# Altium PCB PCB1.PcbDoc
Units mm, origin at the board's own origin, x right, y up, seen from the top; angles counter-clockwise.
Board outline 47.5 x 49.25 mm, 2 copper layers (Top Layer, Bottom Layer); 19 components, 15 nets, 95 pads, 6 vias.
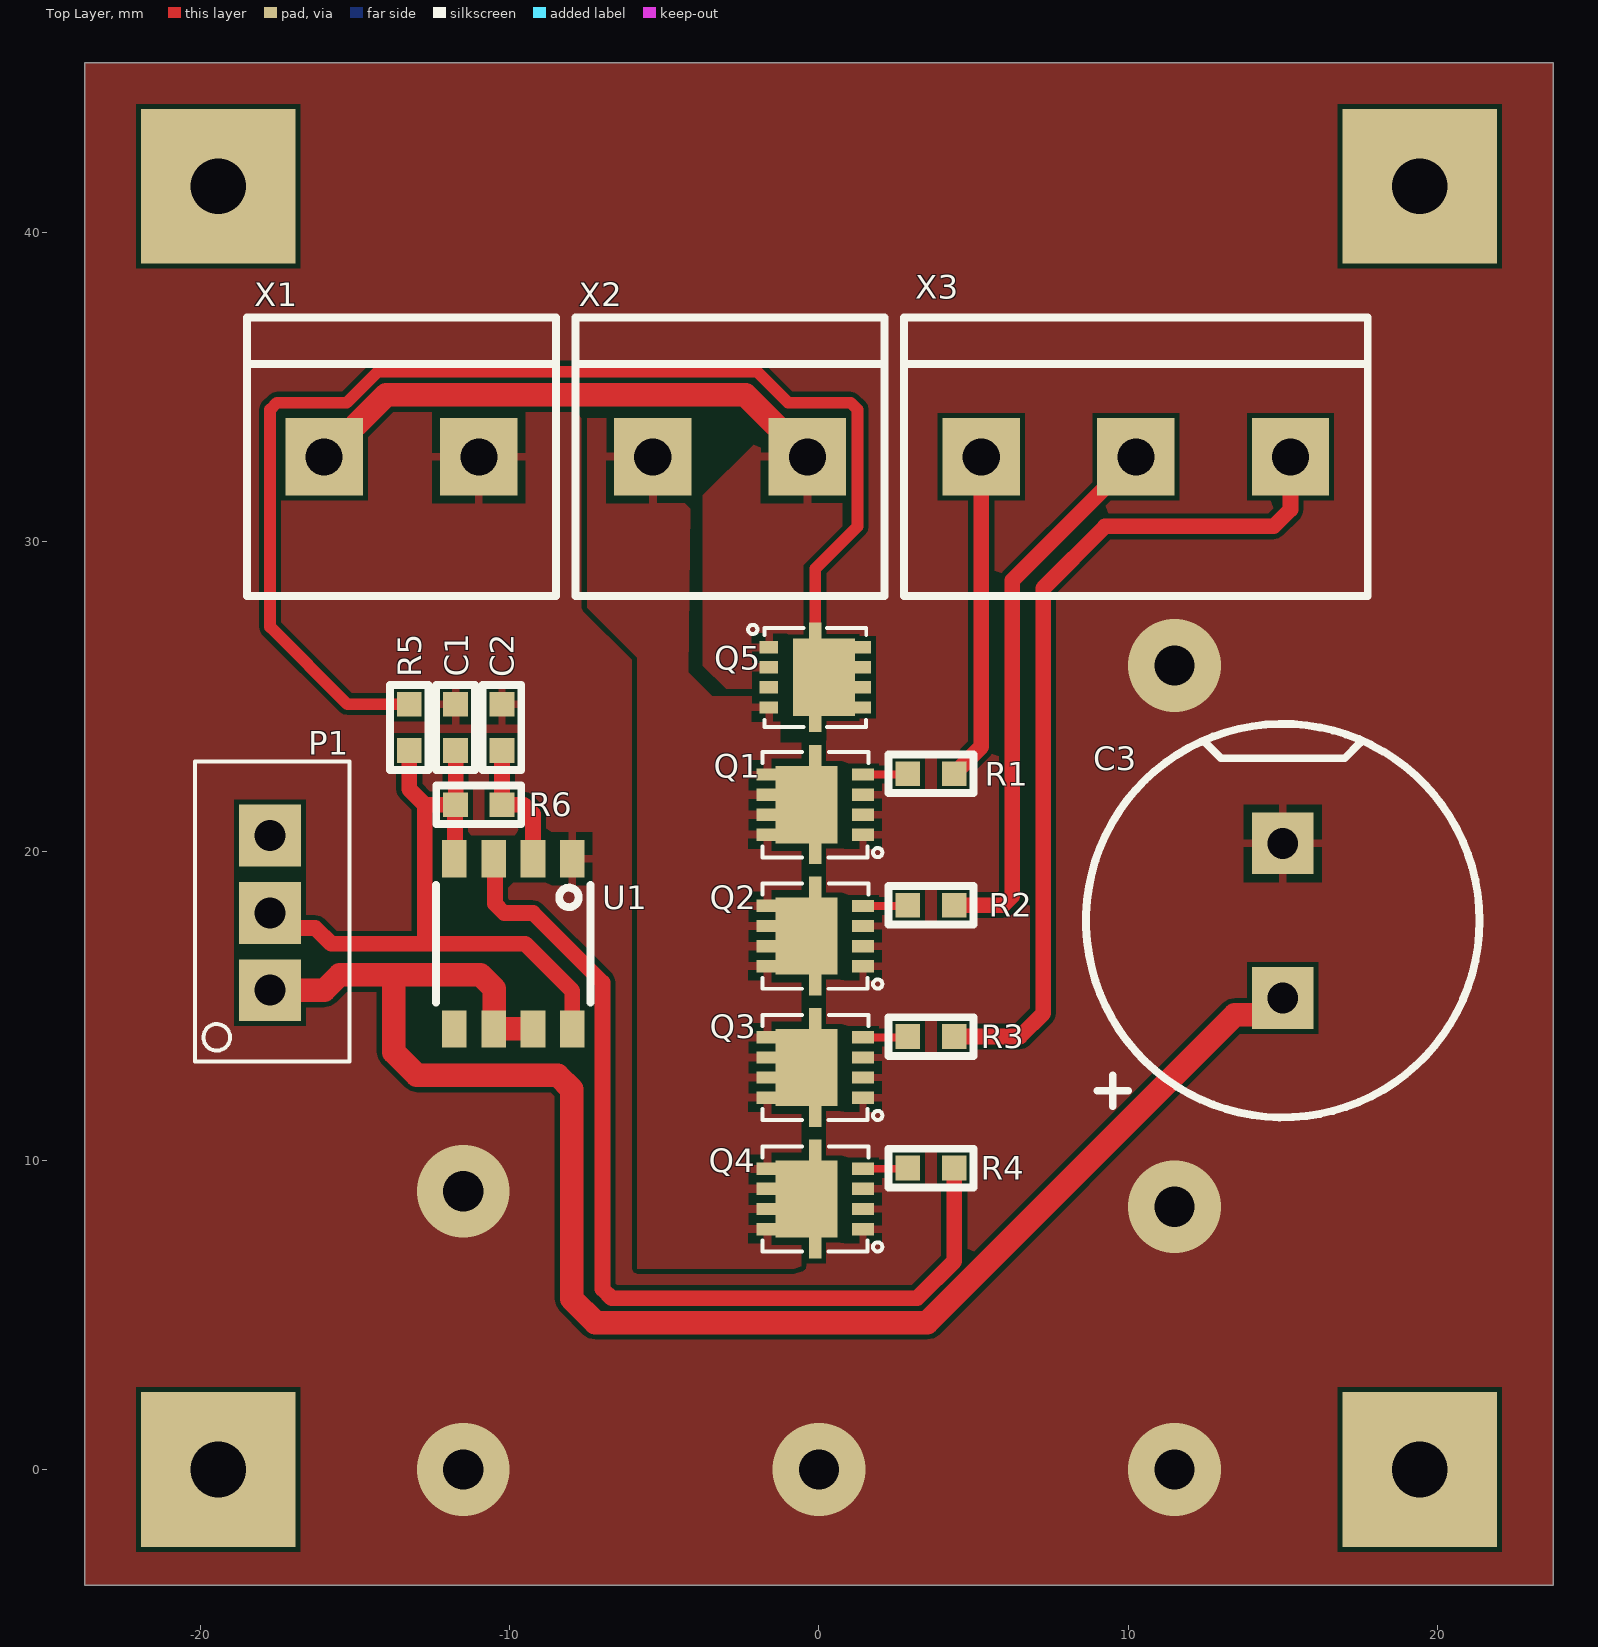
[diagram p0: Top Layer view]
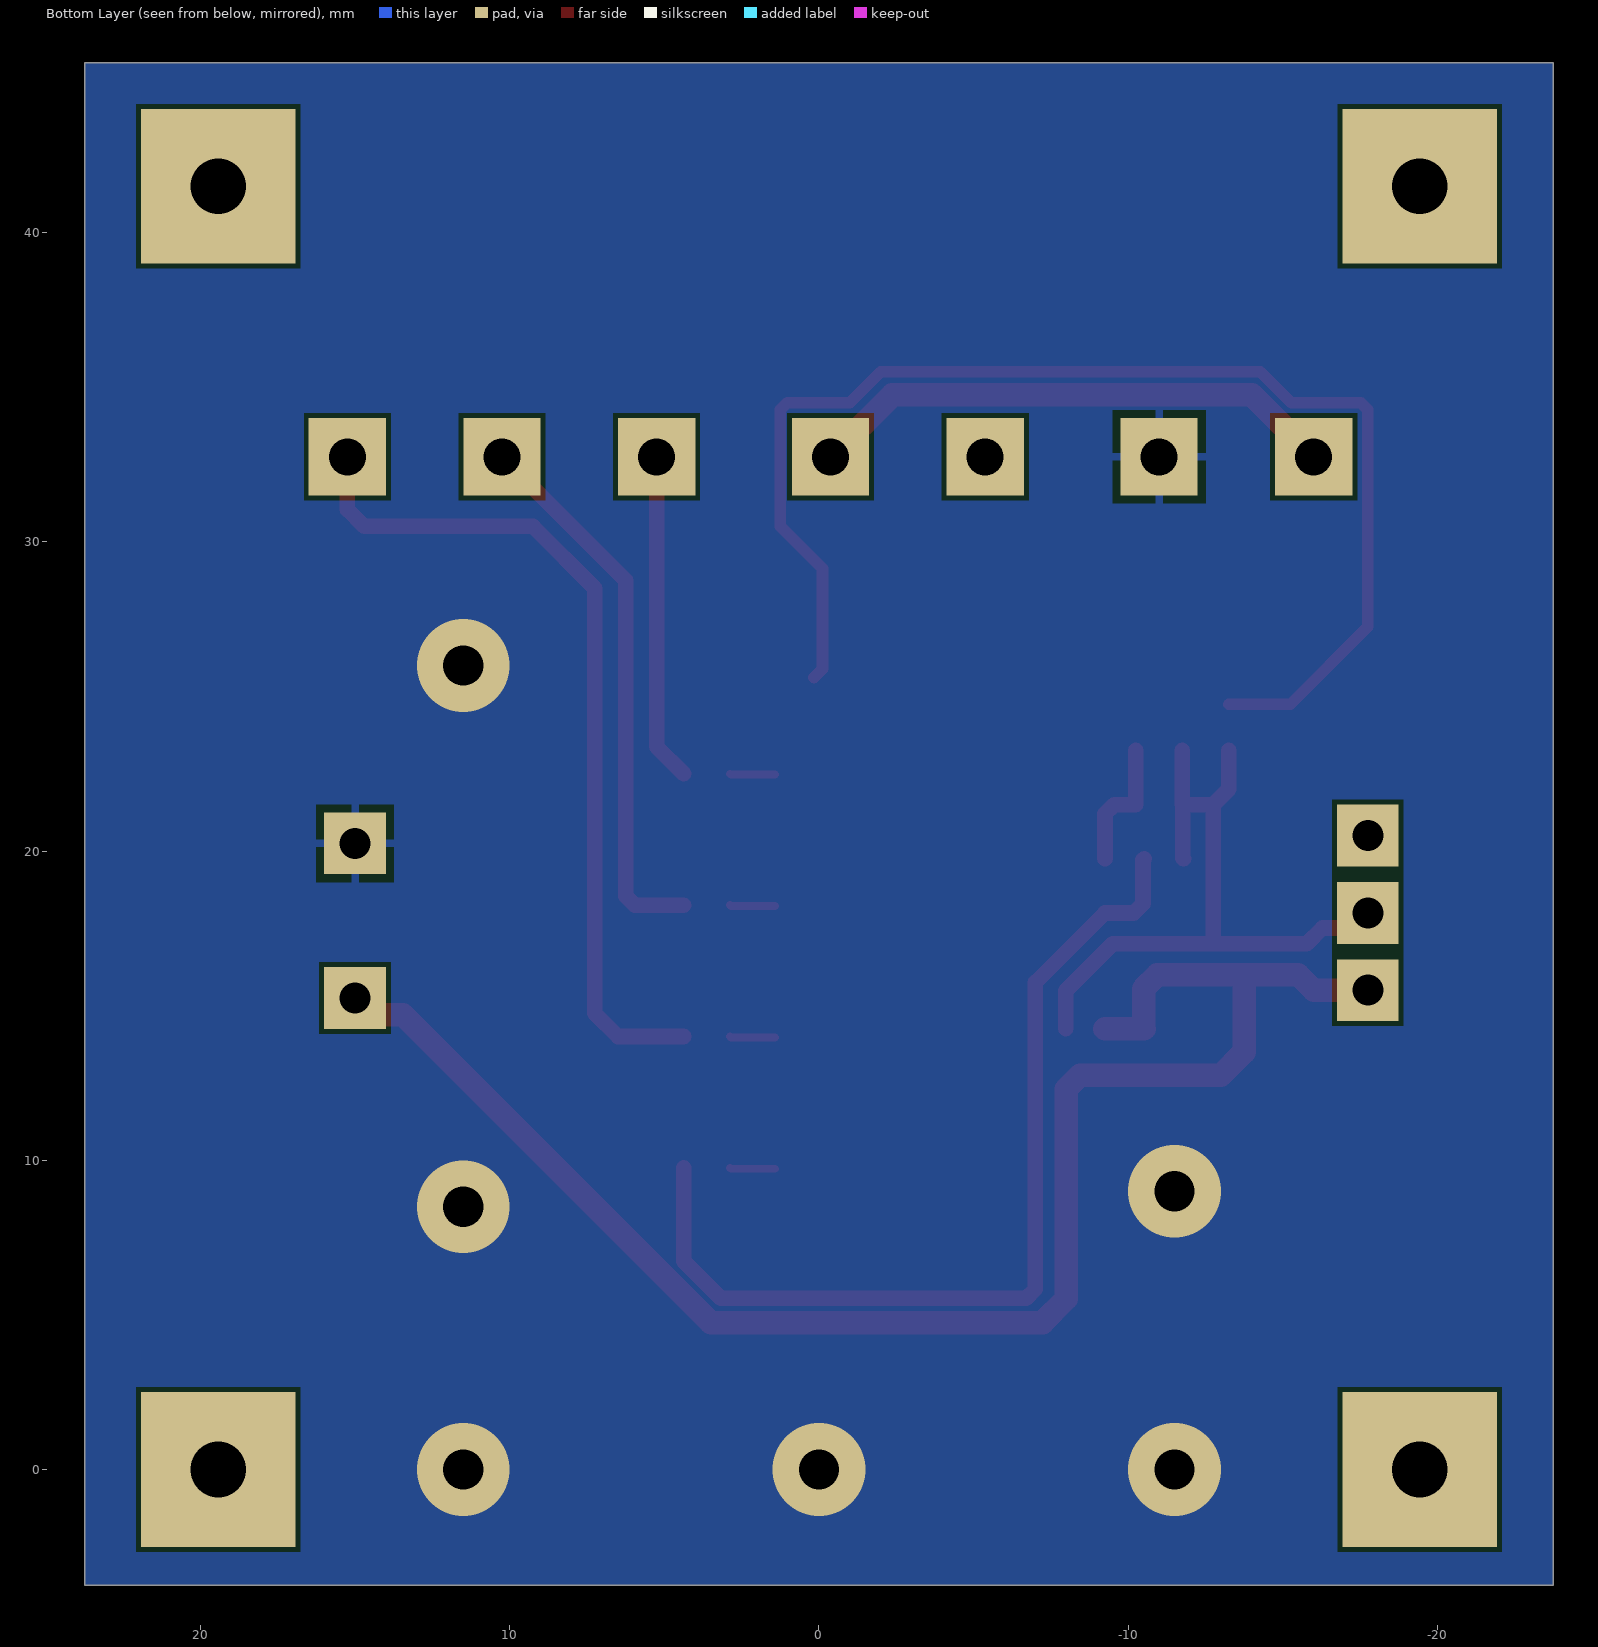
[diagram p1: Bottom Layer view, seen from below]
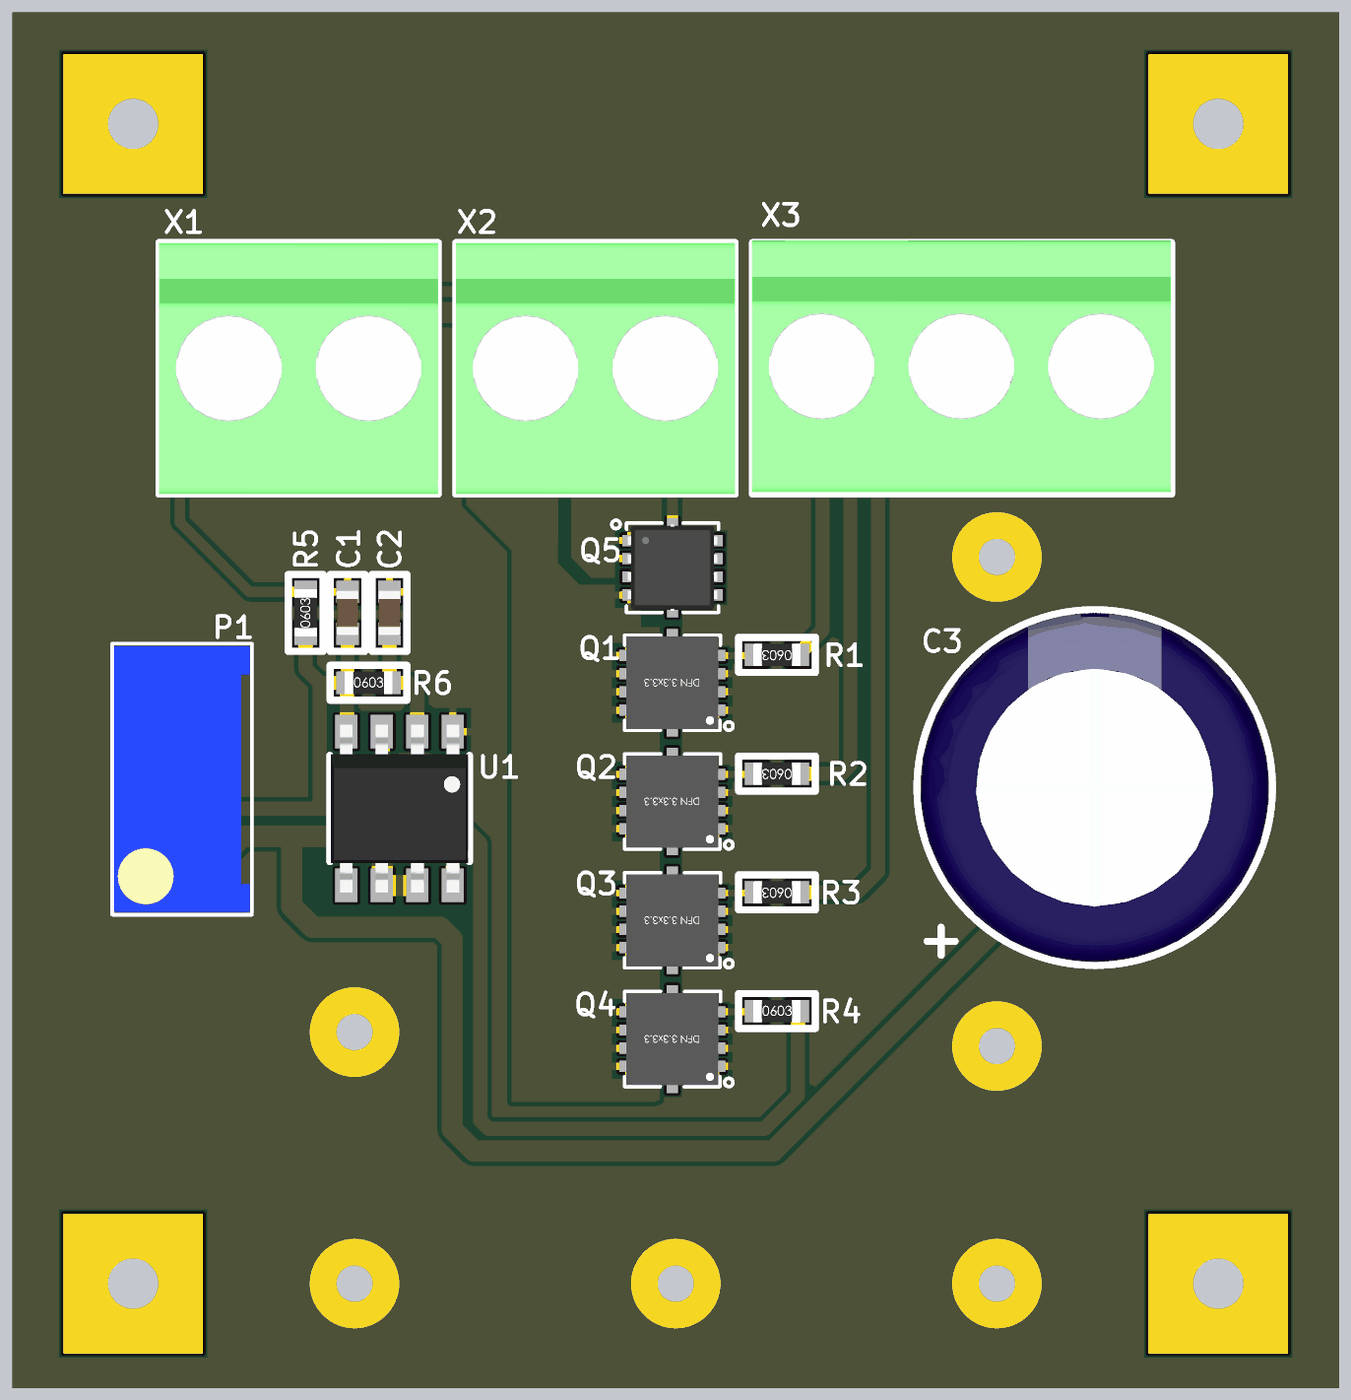
[diagram p2: 3D render of the assembled board from above, using the file's embedded part models]

## Layer stack, top to bottom
Top Solder: solder mask 0.0102, Solder Resist, Dk 3.5
Top Layer: signal copper 0.0356
Dielectric 1: dielectric 0.32, FR-4, Dk 4.8
Bottom Layer: signal copper 0.0356
Bottom Solder: solder mask 0.0102, Solder Resist, Dk 3.5

## Board outline
-23.75,-3.75 23.75,-3.75 23.75,45.5 -23.75,45.5

## Design rules (kind name [scope] priority, off if disabled: settings)
Clearance [All] p1: gap=0.152 ignorepadtopadclearanceinfootprint=FALSE except(0: Arc-Hole Track-Hole SMDPad-Hole THPad-Hole Via-Hole Fill-Hole Poly-Hole Region-Hole Text-Hole)
PolygonConnect [All] p1: connectstyle=Relief reliefconductorwidth=0.254 reliefentries=4 polygonreliefangle="90 Angle" airgapwidth=0.254
RoutingVias [All] p1: holewidth=0.711 width=1.27 viastyle="Through Hole" minholewidth=0.711 minwidth=1.27 maxholewidth=0.711 maxwidth=1.27
SolderMaskExpansion [All] p1: expansion=0.102 istentingtop=FALSE
Width [All] p1: maxlimit=0.762 minlimit=0.254 preferedwidth=0.508 minimp=50.000000 maximp=50.000000 favimp=50.000000
30 further rules are at their usual default settings.

## Components (designator, comment, footprint, x,y, rotation, side; value= is the part's Value field where it differs from the comment)
C1 "Capacitor" CAP_0603 -11.75,24 r270 top
C2 "Capacitor" CAP_0603 -10.25,24 r90 top
C3 "Capacitor_Pol" CAP_POL_12.5x20 15,17.75 r180 top value=1000uF
P1 "Potentiometer" 3296w -17.75,15.5 r90 top
Q1 "YJQ35N04A" DFN3.3x3.3 -0.125,21.5 r180 top
Q2 "YJQ35N04A" DFN3.3x3.3 -0.125,17.25 r180 top
Q3 "YJQ35N04A" DFN3.3x3.3 -0.125,13 r180 top
Q4 "YJQ35N04A" DFN3.3x3.3 -0.125,8.75 r180 top
Q5 "AON7407" DFN3x3 -0.116,25.617 r0 top
R1 "Resistor" RES_0603 3.625,22.5 r180 top
R2 "Resistor" RES_0603 3.625,18.25 r180 top
R3 "Resistor" RES_0603 3.625,14 r180 top
R4 "Resistor" RES_0603 3.625,9.75 r0 top
R5 "Resistor" RES_0603 -13.25,24 r90 top
R6 "Resistor" RES_0603 -11,21.5 r0 top
U1 "NE555" SO8 -9.885,17 r180 top
X1 "SUPLY" "SCREW_TERMINAL_X2 5mm" -16,32.75 r0 top
X2 "SUPLY" "SCREW_TERMINAL_X2 5mm" -5.375,32.75 r0 top
X3 "?" "SCREW_TERMINAL_X3 5mm" 5.25,32.75 r0 top

## Footprints (in the part's own frame and the unit in brackets; to place one, negate y for a bottom-side part, rotate by r counter-clockwise, add the part's x,y. Pads: shape width x height; smd on the part's side, far side on the other; paste and mask are expansions set on the pad)
3296w [mm]
  rect 2x2 hole 1: 1(0,0) 2(2.5,0) 3(5,0)
  silkscreen extent -2.3,-2.58 7.4,2.42, body extent -2.2,-2.5 7.3,2.35, height 11.55
CAP_0603 [mm]
  rect 0.8x0.8 smd: 1(-0.75,0) 2(0.75,0)
  silkscreen extent -1.38,-0.63 1.38,0.63, body extent -0.8,-0.4 0.8,0.4, height 0.6
CAP_POL_12.5x20 [mm]
  rect 2x2 hole 1: 1(0,2.5) 2(0,-2.5)
  silkscreen extent -6.36,-6.36 6.36,6.36, body extent -6.25,-6.25 6.25,6.25, height 20.5
DFN3.3x3.3 [mm]
  rect 0.7x0.4 smd: 1(-1.55,0.975) 1(-1.55,-0.325) 1(-1.55,0.325) 4(-1.55,-0.975) 5(1.55,0.975) 5(1.55,-0.325) 5(1.55,0.325) 5(1.55,-0.976)
  rect 0.4x0.7 smd: 5(0,1.575) 5(0,-1.575)
  rect 2x2.5 smd: 5(0.275,0)
  silkscreen extent -2.18,-1.7 1.7,1.7, body extent -1.66,-1.65 1.66,1.65, height 0.75
DFN3x3 [mm]
  rect 0.6x0.4 smd: 1(-1.5,-0.325) 1(-1.5,0.325) 1(-1.5,0.975) 4(-1.5,-0.975) 5(1.5,-0.975) 5(1.5,-0.325) 5(1.5,0.325) 5(1.5,0.975)
  rect 0.4x0.6 smd: 5(0,-1.473) 5(0,1.473)
  rect 2x2.5 smd: 5(0.275,0)
  silkscreen extent -2.17,-1.6 1.65,1.7, body extent -1.6,-1.55 1.6,1.55, height 0.8
RES_0603 [mm]
  rect 0.8x0.8 smd: 1(-0.75,0) 2(0.75,0)
  silkscreen extent -1.38,-0.63 1.38,0.63, body extent -0.85,-0.4 0.85,0.4, height 0.56
"SCREW_TERMINAL_X2 5mm" [mm] "RASTER 5 mm"
  rect 2.5x2.5 hole 1.2: 1(0,0) 2(5,0)
  silkscreen extent -2.5,-4.5 7.5,4.5, body extent -2.5,-4.5 7.5,4.5, height 14.05
"SCREW_TERMINAL_X3 5mm" [mm] "RASTER 5 mm"
  rect 2.5x2.5 hole 1.2: 1(0,0) 2(5,0) 3(10,0)
  silkscreen extent -2.5,-4.5 12.5,4.5, body extent -2.53,-4.43 12.47,4.57, height 14.05
SO8 [mm]
  rect 0.8x1.2 smd: 1(-1.905,-2.75) 2(-0.635,-2.75) 3(0.635,-2.75) 4(1.905,-2.75) 5(1.905,2.75) 6(0.635,2.75) 7(-0.635,2.75) 8(-1.905,2.75)
  silkscreen extent -2.5,-1.9 2.5,1.9, body extent -2.46,-3 2.46,3, height 1.62

## Part data
C1 C2: Capacitance=100nF
P1: Resistance=100k
R1 R2 R3: Resistance=4.7k
R4: Resistance=1k
R5: Resistance=470
R6: Resistance=10k
X1 X2: library part "Double connector"
X3: library part "Tripple Connecotr"

## Free pads (board coordinates)
  rect 5x5 hole 1.8: MH1(-19.425,0) MH2(19.425,0) MH3(-19.425,41.5) MH4(19.425,41.5)

## Via types
v1: diameter 3, hole 1.3, Top Layer to Bottom Layer, 6 vias

## Nets (pads, with @x,y where several pads share a name; then routed paths per layer and width w, separated by ;. In a path a pad name is that pad's centre, name@x,y a point inside that pad or via, vN(x,y) a via of type N, cw(c..) or ccw(c..) an arc to the next point about the centre after c; other vN are vias at no path point)
GND: C1.1 C2.2 C3.2 Q1.1 Q2.1 Q3.1 Q4.1 U1.1 X1.2
  other v1: -11.5,0 0,0 11.5,0 11.5,8.5 -11.5,9 11.5,26
NetC1_2: C1.2 P1.2 R5.1 R6.1 U1.4 U1.8 | length 23
  Top Layer w0.508: P1.2 -17.262,17.512 -16.286,17.512 -15.773,17 -12.75,17 ; R5.1 -13.25,22 -12.75,21.5 ; U1.4 -11.77,19.77 -11.77,21.48 R6.1 ; C1.2 R6.1 ; U1.8 -7.98,15.48 -9.5,17 -12.75,17 ; -12.75,17 -12.75,21.5 ; -12.75,21.5 R6.1
NetC2_1: C2.1 R6.2 U1.2 | length 4.3
  Top Layer w0.508: C2.1 R6.2 -9.548,21.5 -9.25,21.202 U1.2
NetC3_1: C3.1 P1.1 U1.6 U1.7 | length 53.4
  Top Layer w0.762: P1.1 -16,15.5 -15.5,16 -13.75,16 ; U1.7 U1.6 -10.501,14.269 -10.501,14.921 -10.5,14.922 -10.5,15.554 -10.946,16 -13.75,16 ; C3.1 14.454,14.704 13.454,14.704 3.5,4.75 -7.231,4.75 -8,5.519 -8,12.304 -8.446,12.75 -13,12.75 -13.75,13.5 -13.75,16
NetQ1_4: Q1.4 R1.2 | length 1.5
  Top Layer w0.254: Q1.4 2.85,22.475 R1.2
NetQ2_4: Q2.4 R2.2 | length 1.5
  Top Layer w0.254: Q2.4 2.85,18.225 R2.2
NetQ3_4: Q3.4 R3.2 | length 1.5
  Top Layer w0.254: Q3.4 2.85,13.975 R3.2
NetQ4_4: Q4.4 R4.1 | length 1.5
  Top Layer w0.254: Q4.4 2.85,9.725 R4.1
NetQ5_5: Q5.5 R5.2 | length 41.9
  Top Layer w0.381: R5.2 -15.25,24.75 -17.75,27.25 -17.75,34.277 -17.527,34.5 -15.274,34.5 -14.274,35.5 -2,35.5 -1,34.5 1.027,34.5 1.25,34.277 1.25,30.5 -0.116,29.134 -0.116,27.09 -0.116,25.892 Q5.5@0.159,25.617
NetR4_2: R4.2 U1.3 | length 30.9
  Top Layer w0.508: U1.3 -10.479,19.709 -10.479,18.298 -10.182,18 -9.25,18 -7,15.75 -7,5.835 -6.702,5.537 3.174,5.537 4.375,6.739 R4.2
OUT+: Q5.1 X1.1 X2.2 | length 17.3
  Top Layer w0.762: X1.1 -14,34.75 -2.375,34.75 X2.2
OUT-: Q1.5 Q2.5 Q3.5 Q4.5 Q5.4 X2.1 | length 2.5
  Top Layer w0.254: X2.1@-6.25,31.875 X2.1 X2.1@-4.5,31.875
TR_1: R1.1 X3.1 | length 10.6
  Top Layer w0.508: R1.1 5.25,23.375 X3.1
TR_2: R2.1 X3.2 | length 17.9
  Top Layer w0.508: R2.1 5.952,18.25 6.25,18.548 6.25,28.75 X3.2
TR_3: R3.1 X3.3 | length 27.7
  Top Layer w0.508: R3.1 6.5,14 7.25,14.75 7.25,28.5 9.25,30.5 14.702,30.5 15.25,31.048 X3.3
pads on no net: P1.3 U1.5

## Polygon pours and split planes (outlines as drawn)
GND on Top Layer "GND_L01_P002" (solid, remove dead copper, pour order 2): -23.75,-3.75 23.75,-3.75 23.75,45.5 -23.75,45.5 -23.75,-3.5
OUT+ on Top Layer "OUT+_L01_P001" (solid, remove dead copper, pour order 1): -0.5,25.25 -0.5,29.25 0.75,30.5 0.75,34.25 -1,34.25 -3.75,31.5 -3.75,26 -3,25.25
OUT- on Top Layer "OUT-_L01_P000" (solid, remove dead copper, pour order 0): 0.875,6.5 0.875,23.5 -1.25,23.5 -1.25,25 -3.444,25 -4.222,25.778 -4.125,34 -7.5,34 -7.5,27.875 -5.875,26.25 -5.875,6.5
GND on Bottom Layer "GND_L02_P003" (solid, remove dead copper, pour order 3): -23.75,-3.75 23.75,-3.75 23.75,45.5 -23.75,45.5 -23.75,-3.5